# EAGLE board MiniPanel_V01 (EAGLE 8.7.1)
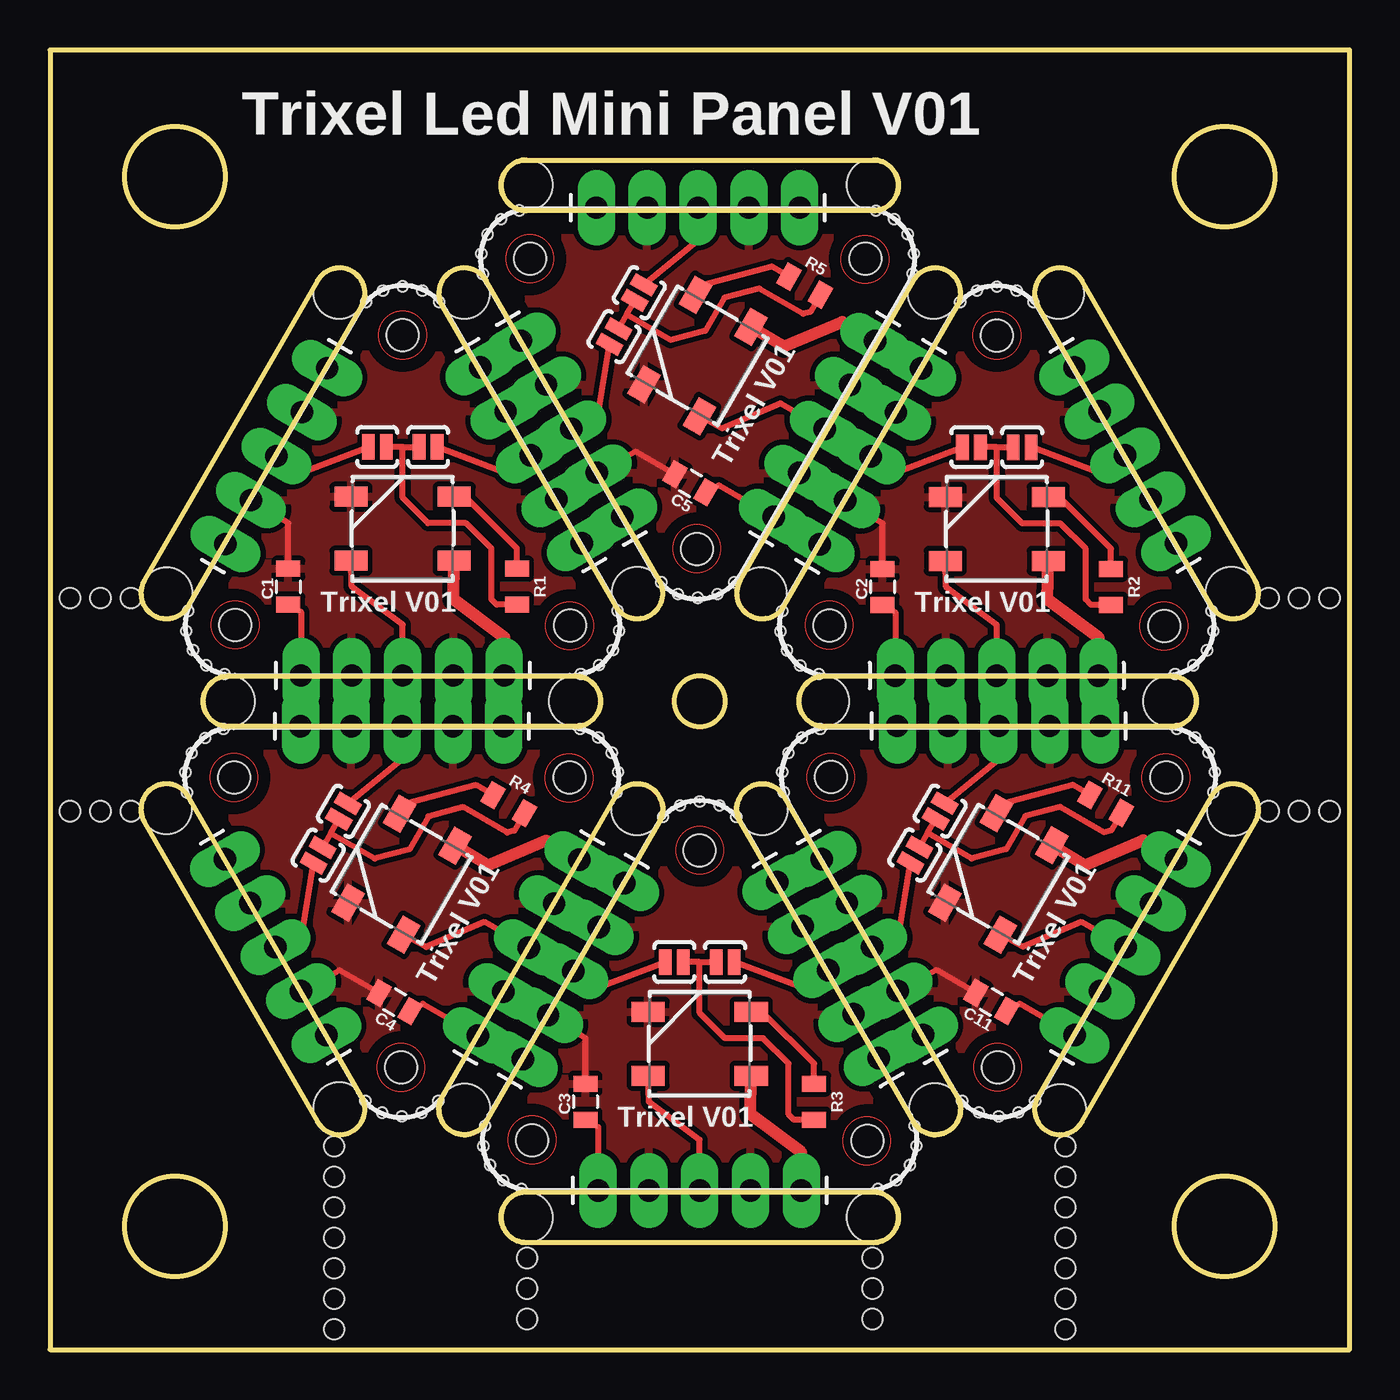
[diagram p0: board, top side]
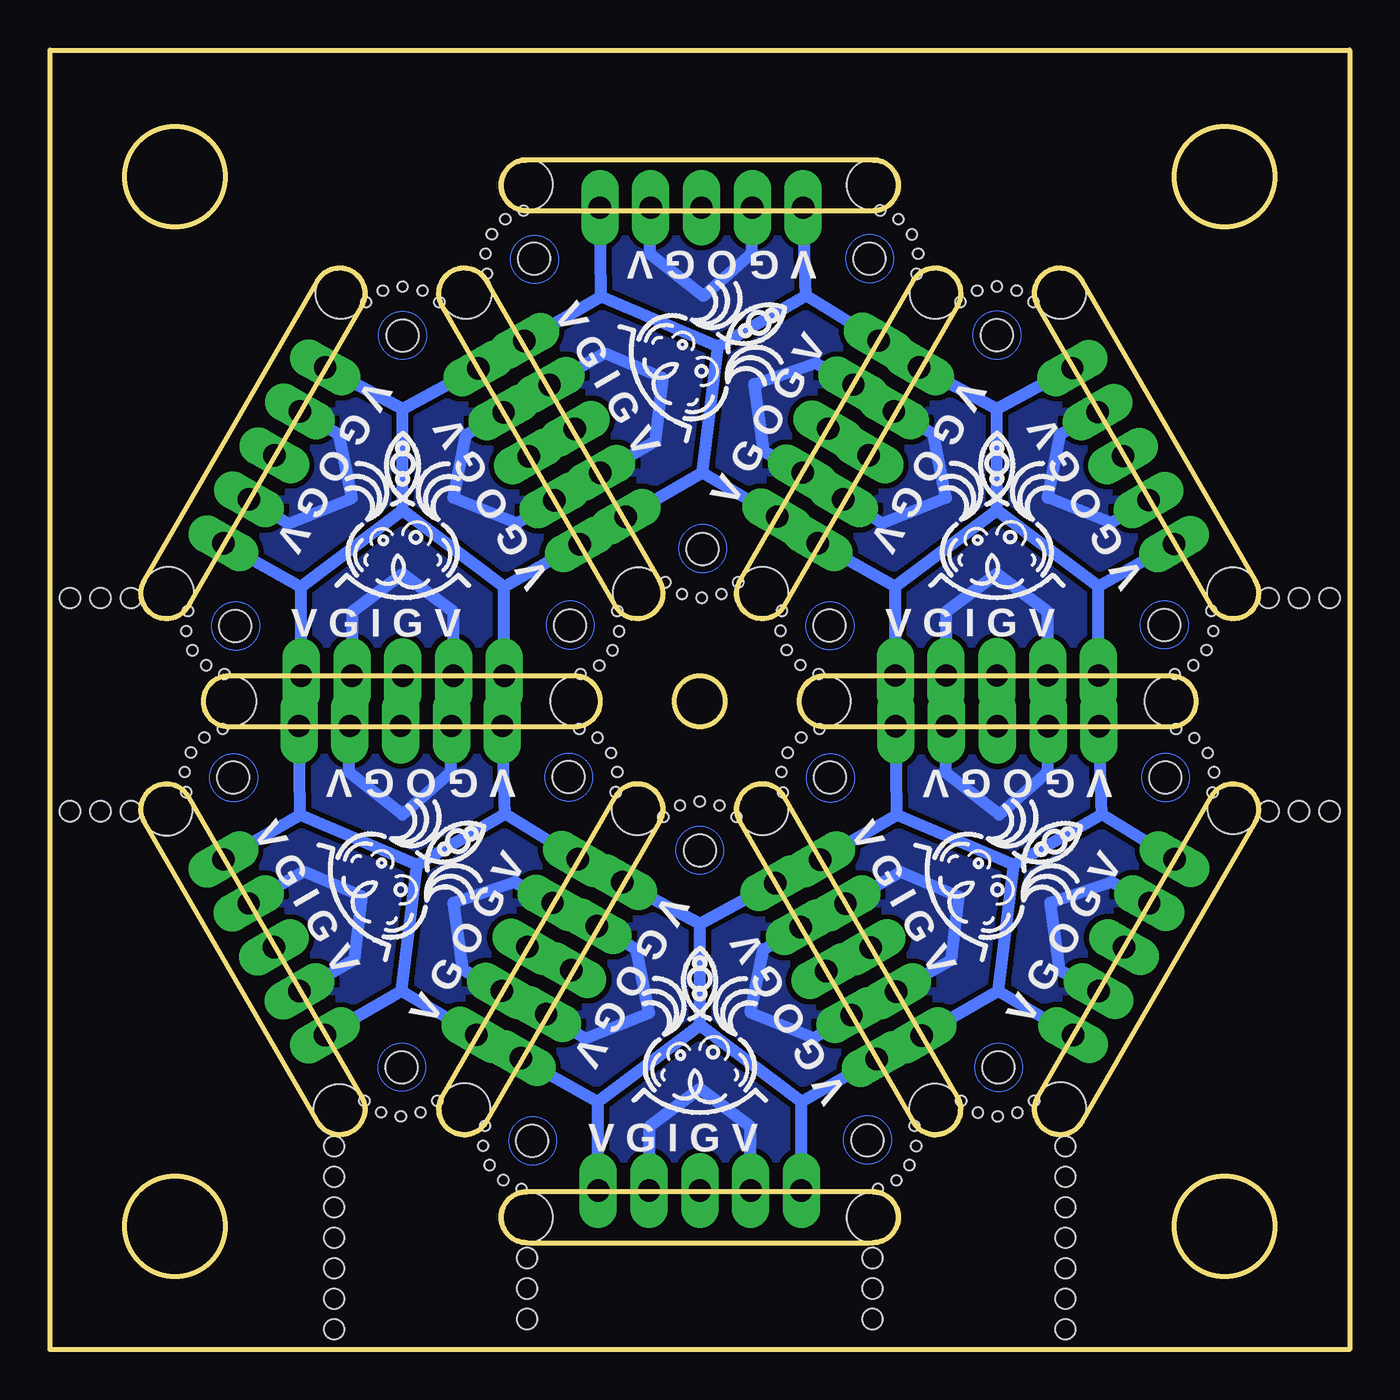
[diagram p1: board, bottom side, seen from below]

Size 65 x 65 mm. Coordinates in mm from the lower left corner, seen from the top.
Outline: 58.08,37.19 arc180 60.28,38.46
Outline: 51.62,53.47 arc180 49.42,52.2
Outline: 56.07,33.69 arc-180 56.07,31.15
Outline: 38.73,31.15 arc-180 38.73,33.69
Outline: 49.42,12.65 arc180 51.62,11.38
Outline: 60.28,26.39 arc180 58.08,27.66
Outline: 45.38,12.65 arc-180 43.18,11.38
Outline: 34.52,26.39 arc-180 36.72,27.66
Outline: 41.17,5.35 arc180 41.17,7.89
Outline: 23.83,7.89 arc180 23.83,5.35
Outline: 19.62,12.65 arc180 21.82,11.38
Outline: 30.48,26.39 arc180 28.28,27.66
Outline: 6.92,27.66 arc180 4.72,26.39
Outline: 13.38,11.38 arc180 15.58,12.65
Outline: 8.94,31.15 arc-180 8.94,33.69
Outline: 26.27,33.69 arc-180 26.27,31.15
Outline: 4.72,38.46 arc180 6.92,37.19
Outline: 15.58,52.2 arc180 13.38,53.47
Outline: 21.82,53.47 arc180 19.62,52.2
Outline: 28.28,37.19 arc180 30.48,38.46
Outline: 23.83,59.5 arc180 23.83,56.96
Outline: 41.17,56.96 arc180 41.17,59.5
Outline: 34.52,38.46 arc180 36.72,37.19
Outline: 45.38,52.2 arc180 43.18,53.47
Outline: 34.52,38.46 arc180 36.72,37.19
Outline: 36.72,37.19 45.38,52.2
Outline: 45.38,52.2 arc180 43.18,53.47
Outline: 43.18,53.47 34.52,38.46
Outline: 23.83,59.5 41.17,59.5
Outline: 41.17,59.5 arc-180 41.17,56.96
Outline: 41.17,56.96 23.83,56.96
Outline: 23.83,56.96 arc-180 23.83,59.5
Outline: 21.82,53.47 arc180 19.62,52.2
Outline: 19.62,52.2 28.28,37.19
Outline: 28.28,37.19 arc180 30.48,38.46
Outline: 30.48,38.46 21.82,53.47
Outline: 13.38,53.47 4.72,38.46
Outline: 4.72,38.46 arc180 6.92,37.19
Outline: 6.92,37.19 15.58,52.2
Outline: 15.58,52.2 arc180 13.38,53.47
Outline: 8.94,31.15 arc-180 8.94,33.69
Outline: 8.94,33.69 26.27,33.69
Outline: 26.27,33.69 arc-180 26.27,31.15
Outline: 26.27,31.15 8.94,31.15
Outline: 4.72,26.39 13.38,11.38
Outline: 13.38,11.38 arc180 15.58,12.65
Outline: 15.58,12.65 6.92,27.66
Outline: 6.92,27.66 arc180 4.72,26.39
Outline: 21.82,11.38 arc-180 19.62,12.65
Outline: 19.62,12.65 28.28,27.66
Outline: 28.28,27.66 arc-180 30.48,26.39
Outline: 30.48,26.39 21.82,11.38
Outline: 41.17,5.35 23.83,5.35
Outline: 23.83,5.35 arc-180 23.83,7.89
Outline: 23.83,7.89 41.17,7.89
Outline: 41.17,7.89 arc-180 41.17,5.35
Outline: 43.18,11.38 arc180 45.38,12.65
Outline: 45.38,12.65 36.72,27.66
Outline: 36.72,27.66 arc180 34.52,26.39
Outline: 34.52,26.39 43.18,11.38
Outline: 51.62,11.38 60.28,26.39
Outline: 60.28,26.39 arc180 58.08,27.66
Outline: 58.08,27.66 49.42,12.65
Outline: 49.42,12.65 arc180 51.62,11.38
Outline: 56.07,33.69 arc-180 56.07,31.15
Outline: 56.07,31.15 38.73,31.15
Outline: 38.73,31.15 arc-180 38.73,33.69
Outline: 38.73,33.69 56.07,33.69
Outline: 60.28,38.46 51.62,53.47
Outline: 51.62,53.47 arc180 49.42,52.2
Outline: 49.42,52.2 58.08,37.19
Outline: 58.08,37.19 arc180 60.28,38.46
Outline: 0,0 65,0 65,65 0,65 0,0
Outline: circle at 58.75,58.67 radius 2.5
Outline: circle at 58.75,6.17 radius 2.5
Outline: circle at 6.25,58.67 radius 2.5
Outline: circle at 6.25,6.17 radius 2.5
Outline: circle at 32.5,32.42 radius 1.27
Copper layers (1*16): Top 0.035mm / dielectric 1.5mm / Bottom 0.035mm
Design rules "default *": minimum track width 6mil, minimum drill 0.35mm, track to track 6mil, track to pad 6mil, pad to pad 6mil, via to via 6mil, smd to smd 6mil, copper to edge 40mil, drill to drill 6mil, minimum pad ring 10mil, minimum via ring 8mil, stop-mask expansion 4mil, vias tented up to drill 20mil, thermal gap 10mil
Holes 1.6 mm at 47.42,14.11 39.05,28.63 55.83,28.62 9.26,36.23 17.64,50.73 26.02,36.2 38.98,36.22 47.36,50.72 55.74,36.19 24.12,10.47 32.5,24.97 40.88,10.44 17.57,14.1 9.2,28.62 25.98,28.61 32.37,40.04 24,54.56 40.78,54.55
Holes 0.51 mm at 45.62,12.44 46.46,11.86 47.45,11.67 48.44,11.86 49.28,12.44 58.18,27.88 58.26,28.89 57.95,29.86 57.27,30.62 56.36,31.04 38.53,31.04 37.61,30.6 36.94,29.84 36.62,28.89 36.7,27.87 6.91,36.95 6.82,35.94 7.15,34.98 7.81,34.22 8.73,33.79 26.55,33.79 27.47,34.24 28.15,34.98 28.47,35.95 28.38,36.95 19.47,52.4 18.63,52.97 17.64,53.17 16.65,52.97 15.81,52.4 36.63,36.94 36.54,35.93 36.87,34.98 37.53,34.21 38.45,33.78 56.27,33.78 57.19,34.23 57.87,34.98 58.19,35.94 58.1,36.94 49.19,52.39 48.35,52.96 47.36,53.16 46.37,52.96 45.53,52.39 21.77,11.19 21.68,10.18 22.01,9.22 22.67,8.46 23.59,8.03 41.41,8.03 42.33,8.48 43.01,9.22 43.33,10.19 43.24,11.19 34.33,26.64 33.49,27.21 32.5,27.41 31.51,27.21 30.67,26.64 15.77,12.43 16.61,11.85 17.6,11.66 18.59,11.85 19.43,12.43 28.33,27.87 28.41,28.88 28.1,29.85 27.42,30.61 26.51,31.03 8.68,31.03 7.76,30.59 7.09,29.83 6.77,28.88 6.85,27.86 30.57,38.37 31.41,37.79 32.4,37.6 33.39,37.79 34.23,38.37 43.13,53.81 43.21,54.82 42.9,55.79 42.22,56.55 41.31,56.97 23.48,56.97 22.56,56.53 21.89,55.77 21.57,54.82 21.65,53.8
Holes 2.54 mm at 14.47,52.83 20.73,52.83 5.84,37.84 29.37,37.86 26.24,32.43 8.97,32.42 44.19,52.83 50.45,52.83 35.56,37.84 59.09,37.86 55.96,32.43 38.69,32.42 29.36,27.01 35.63,27.01 20.74,12.02 44.27,12.04 41.14,6.61 23.87,6.6 5.82,27.06 14.46,12.09 59.17,26.98 50.54,11.99 32.48,32.41 41.13,58.26 23.86,58.25
Holes 5 mm at 6.24,58.65 58.74,58.65 58.74,6.15 6.24,6.15
Holes 1.02 mm at 4.05,37.59 2.53,37.59 1.01,37.59 64,37.59 62.47,37.59 60.95,37.59 4.05,26.92 2.53,26.92 1.01,26.92 64,26.92 62.47,26.92 60.95,26.92 23.87,4.57 23.87,3.05 23.87,1.52 41.14,4.57 41.14,3.05 41.14,1.52 14.21,7.11 14.21,8.64 14.21,10.16 14.21,5.59 14.21,4.06 14.21,2.54 14.21,1.02 50.79,7.11 50.79,8.64 50.79,10.16 50.79,5.59 50.79,4.06 50.79,2.54 50.79,1.02

## Footprints (pad centres in the part's own frame; a part is rotated, then mirrored left to right if it is on the bottom)
0805 = smd 0.8 x 1.2: 1 -0.9,0; 2 0.9,0
WS2812B = smd 1.651 x 1: 1 -2.577,1.6; 2 -2.577,-1.6; 3 2.577,-1.6; 4 2.577,1.6
1X05_LONGPADS = drill 1.118 pad 1.88 long: 1 0,0; 2 2.54,0; 3 5.08,0; 4 7.62,0; 5 10.16,0
PAD-JUMPER-2-NO_YES_SILK = smd 0.635 x 1.27: 1 -0.45,0; 2 0.45,0

## Placement (x,y rotation side)
C1  0.1uF  [0805]  11.92,38.16 270 top
C2  0.1uF  [0805]  41.64,38.15 270 top
C3  0.1uF  [0805]  26.78,12.4 270 top
C4  0.1uF  [0805]  17.24,17.38 330 top
C5  0.1uF  [0805]  32.04,43.32 330 top
C11  0.1uF  [0805]  47.09,17.39 330 top
D1  [WS2812B]  17.64,41.06 180 top
D2  [WS2812B]  47.36,41.05 180 top
D3  [WS2812B]  32.5,15.3 180 top
D4  [WS2812B]  17.59,23.78 240 top
D5  [WS2812B]  32.39,49.72 240 top
D11  [WS2812B]  47.44,23.79 240 top
J1  [1X05_LONGPADS]  12.56,33.72 0 top
J2  [1X05_LONGPADS]  26.6,40.33 120 top
J3  [1X05_LONGPADS]  8.78,40.29 60 top
J4  [1X05_LONGPADS]  42.28,33.7 0 top
J5  [1X05_LONGPADS]  56.32,40.32 120 top
J6  [1X05_LONGPADS]  38.5,40.28 60 top
J7  [1X05_LONGPADS]  27.42,7.96 0 top
J8  [1X05_LONGPADS]  41.46,14.57 120 top
J9  [1X05_LONGPADS]  23.64,14.53 60 top
J10  [1X05_LONGPADS]  21.4,15.71 60 top
J11  [1X05_LONGPADS]  22.69,31.17 180 top
J12  [1X05_LONGPADS]  13.82,15.72 120 top
J13  [1X05_LONGPADS]  36.2,41.65 60 top
J14  [1X05_LONGPADS]  37.49,57.11 180 top
J15  [1X05_LONGPADS]  28.62,41.66 120 top
J35  [1X05_LONGPADS]  51.25,15.72 60 top
J36  [1X05_LONGPADS]  52.54,31.18 180 top
J37  [1X05_LONGPADS]  43.67,15.73 120 top
JP1  JUMPER-PAD-2-NOYES_SILK  [PAD-JUMPER-2-NO_YES_SILK]  16.37,45.15 180 top
JP2  JUMPER-PAD-2-NOYES_SILK  [PAD-JUMPER-2-NO_YES_SILK]  18.91,45.15 0 top
JP3  JUMPER-PAD-2-NOYES_SILK  [PAD-JUMPER-2-NO_YES_SILK]  46.09,45.13 180 top
JP4  JUMPER-PAD-2-NOYES_SILK  [PAD-JUMPER-2-NO_YES_SILK]  48.63,45.13 0 top
JP5  JUMPER-PAD-2-NOYES_SILK  [PAD-JUMPER-2-NO_YES_SILK]  31.23,19.39 180 top
JP6  JUMPER-PAD-2-NOYES_SILK  [PAD-JUMPER-2-NO_YES_SILK]  33.77,19.39 0 top
JP7  JUMPER-PAD-2-NOYES_SILK  [PAD-JUMPER-2-NO_YES_SILK]  13.41,24.72 240 top
JP8  JUMPER-PAD-2-NOYES_SILK  [PAD-JUMPER-2-NO_YES_SILK]  14.68,26.92 60 top
JP9  JUMPER-PAD-2-NOYES_SILK  [PAD-JUMPER-2-NO_YES_SILK]  28.21,50.66 240 top
JP10  JUMPER-PAD-2-NOYES_SILK  [PAD-JUMPER-2-NO_YES_SILK]  29.48,52.86 60 top
JP25  JUMPER-PAD-2-NOYES_SILK  [PAD-JUMPER-2-NO_YES_SILK]  43.26,24.73 240 top
JP26  JUMPER-PAD-2-NOYES_SILK  [PAD-JUMPER-2-NO_YES_SILK]  44.53,26.93 60 top
R1  1k  [0805]  23.35,38.16 270 top
R2  1k  [0805]  53.07,38.15 270 top
R3  1k  [0805]  38.21,12.4 270 top
R4  1k  [0805]  22.95,27.28 330 top
R5  1k  [0805]  37.75,53.22 330 top
R11  1k  [0805]  52.8,27.29 330 top

## Library data of the parts
C1-C5 C11 = SparkFun-Capacitors
D1-D5 D11 = SparkFun-LED; PROD_ID: DIO-12503
J1-J15 J35-J37 = SparkFun-Connectors
JP1-JP10 JP25 JP26 = SparkFun-Passives
R1-R5 R11 = SparkFun-Resistors

## Nets
DIN1: D1.4 J1.3
DIN2: D2.4 J4.3
DIN3: D3.4 J7.3
DIN4: D4.4 J10.3
DIN5: D5.4 J13.3
DIN10: D11.4 J35.3
DOUT1: JP1.1 JP2.1 R1.2
DOUT2: JP3.1 JP4.1 R2.2
DOUT3: JP5.1 JP6.1 R3.2
DOUT4: JP7.1 JP8.1 R4.2
DOUT5: JP9.1 JP10.1 R5.2
DOUT10: JP25.1 JP26.1 R11.2
GND1: C1.1 D1.3 J1.2 J1.4 J2.2 J2.4 J3.2 J3.4
GND2: C2.1 D2.3 J4.2 J4.4 J5.2 J5.4 J6.2 J6.4
GND3: C3.1 D3.3 J7.2 J7.4 J8.2 J8.4 J9.2 J9.4
GND4: C4.1 D4.3 J10.2 J10.4 J11.2 J11.4 J12.2 J12.4
GND5: C5.1 D5.3 J13.2 J13.4 J14.2 J14.4 J15.2 J15.4
GND10: C11.1 D11.3 J35.2 J35.4 J36.2 J36.4 J37.2 J37.4
N$1: J2.3 JP2.2
N$2: D1.2 R1.1
N$3: J3.3 JP1.2
N$4: J5.3 JP4.2
N$5: D2.2 R2.1
N$6: J6.3 JP3.2
N$7: J8.3 JP6.2
N$8: D3.2 R3.1
N$9: J9.3 JP5.2
N$10: J11.3 JP8.2
N$11: D4.2 R4.1
N$12: J12.3 JP7.2
N$13: J14.3 JP10.2
N$14: D5.2 R5.1
N$15: J15.3 JP9.2
N$35: J36.3 JP26.2
N$36: D11.2 R11.1
N$37: J37.3 JP25.2
VIN1: C1.2 D1.1 J1.1 J1.5 J2.1 J2.5 J3.1 J3.5
VIN2: C2.2 D2.1 J4.1 J4.5 J5.1 J5.5 J6.1 J6.5
VIN3: C3.2 D3.1 J7.1 J7.5 J8.1 J8.5 J9.1 J9.5
VIN4: C4.2 D4.1 J10.1 J10.5 J11.1 J11.5 J12.1 J12.5
VIN5: C5.2 D5.1 J13.1 J13.5 J14.1 J14.5 J15.1 J15.5
VIN10: C11.2 D11.1 J35.1 J35.5 J36.1 J36.5 J37.1 J37.5

## Tracks (layer width: path | path; a pad name or v marks a point on that pad's centre or on a via)
DIN1
  Top 0.305: J1.3 17.64,36.26 15.1,38.16 D1.4
DIN2
  Top 0.305: J4.3 47.36,36.24 44.82,38.15 D2.4
DIN3
  Top 0.305: J7.3 32.5,10.49 29.96,12.4 D3.4
DIN4
  Top 0.305: J10.3 21.74,21.38 18.82,20.13 D4.4
DIN5
  Top 0.305: J13.3 36.54,47.32 33.62,46.07 D5.4
DIN10
  Top 0.305: J35.3 51.59,21.39 48.67,20.14 D11.4
DOUT1
  Top 0.305: R1.2 22.35,37.26 22.08,37.52 22.08,40.06 20.81,41.34 18.91,41.34 17.64,42.6 17.64,45.15 | 17.64,45.15 JP2.1 | 17.64,45.15 JP1.1
DOUT2
  Top 0.305: R2.2 52.07,37.25 51.8,37.52 51.8,40.05 50.53,41.33 48.63,41.33 47.36,42.59 47.36,45.13 | 47.36,45.13 JP4.1 | 47.36,45.13 JP3.1
DOUT3
  Top 0.305: R3.2 37.21,11.5 36.94,11.77 36.94,14.3 35.67,15.57 33.77,15.57 32.5,16.84 32.5,19.39 | 32.5,19.39 JP6.1 | 32.5,19.39 JP5.1
DOUT4
  Top 0.305: R4.2 23.23,25.96 22.87,25.86 20.67,27.13 18.93,26.67 17.98,25.02 16.24,24.55 14.04,25.82 | 14.04,25.82 JP8.1 | 14.04,25.82 JP7.1
DOUT5
  Top 0.305: R5.2 38.03,51.9 37.67,51.8 35.47,53.07 33.73,52.61 32.78,50.96 31.04,50.49 28.84,51.76 | 28.84,51.76 JP10.1 | 28.84,51.76 JP9.1
DOUT10
  Top 0.305: R11.2 53.08,25.97 52.72,25.87 50.52,27.14 48.78,26.68 47.83,25.03 46.09,24.56 43.89,25.83 | 43.89,25.83 JP26.1 | 43.89,25.83 JP25.1
GND1
  Top 0.305: C1.1 11.92,41.34 J3.2
  Bottom 0.61: J1.2 15.1,36.89 17.64,38.8 20.18,36.89 J1.4 | J3.2 11.92,41.34 15.1,42.6 14.46,45.78 J3.4 | J2.2 23.35,41.34 20.18,42.6 20.81,45.78 J2.4
  pour Bottom (isolate 0.254): 9.38,34.67 25.89,34.67 27.16,37.21 19.22,50.86 16.05,50.86 8.11,37.52
  pour Top (isolate 0.254): 9.38,34.67 25.89,34.67 27.16,37.21 19.22,50.86 16.05,50.86 8.11,37.52
GND2
  Top 0.305: C2.1 41.64,41.33 J6.2
  Bottom 0.61: J4.2 44.82,36.88 47.36,38.78 49.9,36.88 J4.4 | J6.2 41.64,41.33 44.82,42.59 44.18,45.77 J6.4 | J5.2 53.07,41.33 49.9,42.59 50.53,45.77 J5.4
  pour Bottom (isolate 0.254): 39.1,34.66 55.61,34.66 56.88,37.2 48.95,50.85 45.77,50.85 37.83,37.52
  pour Top (isolate 0.254): 39.1,34.66 55.61,34.66 56.88,37.2 48.95,50.85 45.77,50.85 37.83,37.52
GND3
  Top 0.305: C3.1 26.78,15.57 J9.2
  Bottom 0.61: J7.2 29.96,11.13 32.5,13.04 35.04,11.13 J7.4 | J9.2 26.78,15.57 29.96,16.84 29.32,20.02 J9.4 | J8.2 38.21,15.57 35.04,16.84 35.67,20.02 J8.4
  pour Bottom (isolate 0.254): 24.24,8.91 40.75,8.91 42.02,11.45 34.09,25.1 30.91,25.1 22.97,11.77
  pour Top (isolate 0.254): 24.24,8.91 40.75,8.91 42.02,11.45 34.09,25.1 30.91,25.1 22.97,11.77
GND4
  Top 0.305: C4.1 14.49,18.97 J12.2
  Bottom 0.61: J10.2 19.92,19.49 19.54,22.65 22.46,23.89 J10.4 | J12.2 14.49,18.97 14.97,22.35 11.91,23.39 J12.4 | J11.2 20.2,28.87 17.51,26.75 15.08,28.89 J11.4
  pour Bottom (isolate 0.254): 18.99,13.43 27.25,27.73 25.68,30.1 9.89,30.05 8.3,27.3 15.88,13.76
  pour Top (isolate 0.254): 18.99,13.43 27.25,27.73 25.68,30.1 9.89,30.05 8.3,27.3 15.88,13.76
GND5
  Top 0.305: C5.1 29.29,44.91 J15.2
  Bottom 0.61: J13.2 34.72,45.43 34.34,48.59 37.26,49.83 J13.4 | J15.2 29.29,44.91 29.77,48.29 26.71,49.33 J15.4 | J14.2 35,54.81 32.31,52.69 29.88,54.83 J14.4
  pour Bottom (isolate 0.254): 33.79,39.37 42.05,53.67 40.48,56.04 24.69,55.99 23.1,53.24 30.68,39.7
  pour Top (isolate 0.254): 33.79,39.37 42.05,53.67 40.48,56.04 24.69,55.99 23.1,53.24 30.68,39.7
GND10
  Top 0.305: C11.1 44.34,18.98 J37.2
  Bottom 0.61: J35.2 49.77,19.5 49.39,22.66 52.31,23.9 J35.4 | J37.2 44.34,18.98 44.82,22.36 41.76,23.4 J37.4 | J36.2 50.05,28.88 47.36,26.76 44.93,28.9 J36.4
  pour Bottom (isolate 0.254): 48.84,13.44 57.1,27.74 55.53,30.11 39.74,30.06 38.15,27.31 45.73,13.77
  pour Top (isolate 0.254): 48.84,13.44 57.1,27.74 55.53,30.11 39.74,30.06 38.15,27.31 45.73,13.77
N$1
  Top 0.305: JP2.2 22.72,43.88 J2.3
N$2
  Top 0.305: R1.1 23.35,40.06 20.81,42.6 D1.2
N$3
  Top 0.305: J3.3 12.56,43.88 JP1.2
N$4
  Top 0.305: JP4.2 52.44,43.87 J5.3
N$5
  Top 0.305: R2.1 53.07,40.05 50.53,42.59 D2.2
N$6
  Top 0.305: J6.3 42.28,43.87 JP3.2
N$7
  Top 0.305: JP6.2 37.58,18.11 J8.3
N$8
  Top 0.305: R3.1 38.21,14.3 35.67,16.84 D3.2
N$9
  Top 0.305: J9.3 27.42,18.11 JP5.2
N$10
  Top 0.305: JP8.2 17.68,29.59 J11.3
N$11
  Top 0.305: R4.1 21.3,28.23 17.83,27.3 D4.2
N$12
  Top 0.305: J12.3 12.6,20.79 JP7.2
N$13
  Top 0.305: JP10.2 32.48,55.53 J14.3
N$14
  Top 0.305: R5.1 36.1,54.17 32.63,53.24 D5.2
N$15
  Top 0.305: J15.3 27.4,46.73 JP9.2
N$35
  Top 0.305: JP26.2 47.53,29.6 J36.3
N$36
  Top 0.305: R11.1 51.15,28.24 47.68,27.31 D11.2
N$37
  Top 0.305: J37.3 42.45,20.8 JP25.2
VIN1
  Top 0.305: C1.2 12.56,36.89 J1.1
  Top 0.61: J1.5 22.72,35.62 20.18,37.52 D1.1
  Bottom 0.61: J1.5 22.72,38.16 | 22.72,38.16 J2.1 | J1.1 12.56,38.16 | J3.5 17.64,47.05 | 17.64,47.05 J2.5 | 12.56,38.16 17.64,41.97 | 17.64,41.97 17.64,47.05 | 17.64,41.97 22.72,38.16 | 12.56,38.16 J3.1
VIN2
  Top 0.305: C2.2 42.28,36.88 J4.1
  Top 0.61: J4.5 52.44,35.61 49.9,37.52 D2.1
  Bottom 0.61: J4.5 52.44,38.15 | 52.44,38.15 J5.1 | J4.1 42.28,38.15 | J6.5 47.36,47.04 | 47.36,47.04 J5.5 | 42.28,38.15 47.36,41.96 | 47.36,41.96 47.36,47.04 | 47.36,41.96 52.44,38.15 | 42.28,38.15 J6.1
VIN3
  Top 0.305: C3.2 27.42,11.13 J7.1
  Top 0.61: J7.5 37.58,9.86 35.04,11.77 D3.1
  Bottom 0.61: J7.5 37.58,12.4 | 37.58,12.4 J8.1 | J7.1 27.42,12.4 | J9.5 32.5,21.29 | 32.5,21.29 J8.5 | 27.42,12.4 32.5,16.21 | 32.5,16.21 32.5,21.29 | 32.5,16.21 37.58,12.4 | 27.42,12.4 J9.1
VIN4
  Top 0.305: C4.2 18.65,17.3 J10.1
  Top 0.61: J10.5 24.83,25.46 21.91,24.21 D4.1
  Bottom 0.61: J10.5 22.63,26.73 | 22.63,26.73 J11.1 | J10.1 17.55,17.93 | J12.5 12.39,26.77 | 12.39,26.77 J11.5 | 17.55,17.93 16.79,24.23 | 16.79,24.23 12.39,26.77 | 16.79,24.23 22.63,26.73 | 17.55,17.93 J12.1
VIN5
  Top 0.305: C5.2 33.45,43.23 J13.1
  Top 0.61: J13.5 39.63,51.4 36.71,50.15 D5.1
  Bottom 0.61: J13.5 37.43,52.67 | 37.43,52.67 J14.1 | J13.1 32.35,43.87 | J15.5 27.19,52.71 | 27.19,52.71 J14.5 | 32.35,43.87 31.59,50.17 | 31.59,50.17 27.19,52.71 | 31.59,50.17 37.43,52.67 | 32.35,43.87 J15.1
VIN10
  Top 0.305: C11.2 48.5,17.3 J35.1
  Top 0.61: J35.5 54.68,25.47 51.76,24.22 D11.1
  Bottom 0.61: J35.5 52.48,26.74 | 52.48,26.74 J36.1 | J35.1 47.4,17.94 | J37.5 42.24,26.78 | 42.24,26.78 J36.5 | 47.4,17.94 46.64,24.24 | 46.64,24.24 42.24,26.78 | 46.64,24.24 52.48,26.74 | 47.4,17.94 J37.1
(copper drawn outside any net)
  shapes: Bottom circle x18, Top circle x18

## Text on the board
tPlace: Trixel Led Mini Panel V01 | Trixel V01 | Trixel V01 | Trixel V01 | Trixel V01 | Trixel V01 | Trixel V01
bPlace: V G O G V | V G I G V | V G O G V | V G O G V | V G O G V | V G O G V | V G O G V | V G I G V | V G I G V | V G O G V | V G O G V | V G I G V | V G I G V | V G O G V | V G O G V | V G O G V | V G O G V | V G I G V
_tNames: R1 | C1 | C1 | R1 | C1 | R1 | R1 | R1 | C1 | C1 | C1 | R1